# Altium PCB Sensor Breakout.PcbDoc
Units mil, origin at the board's own origin, x right, y up, seen from the top; angles counter-clockwise.
Board outline 920 x 1000 mil, 2 copper layers (Top Layer, Bottom Layer); 27 components, 13 nets, 79 pads, 46 vias.
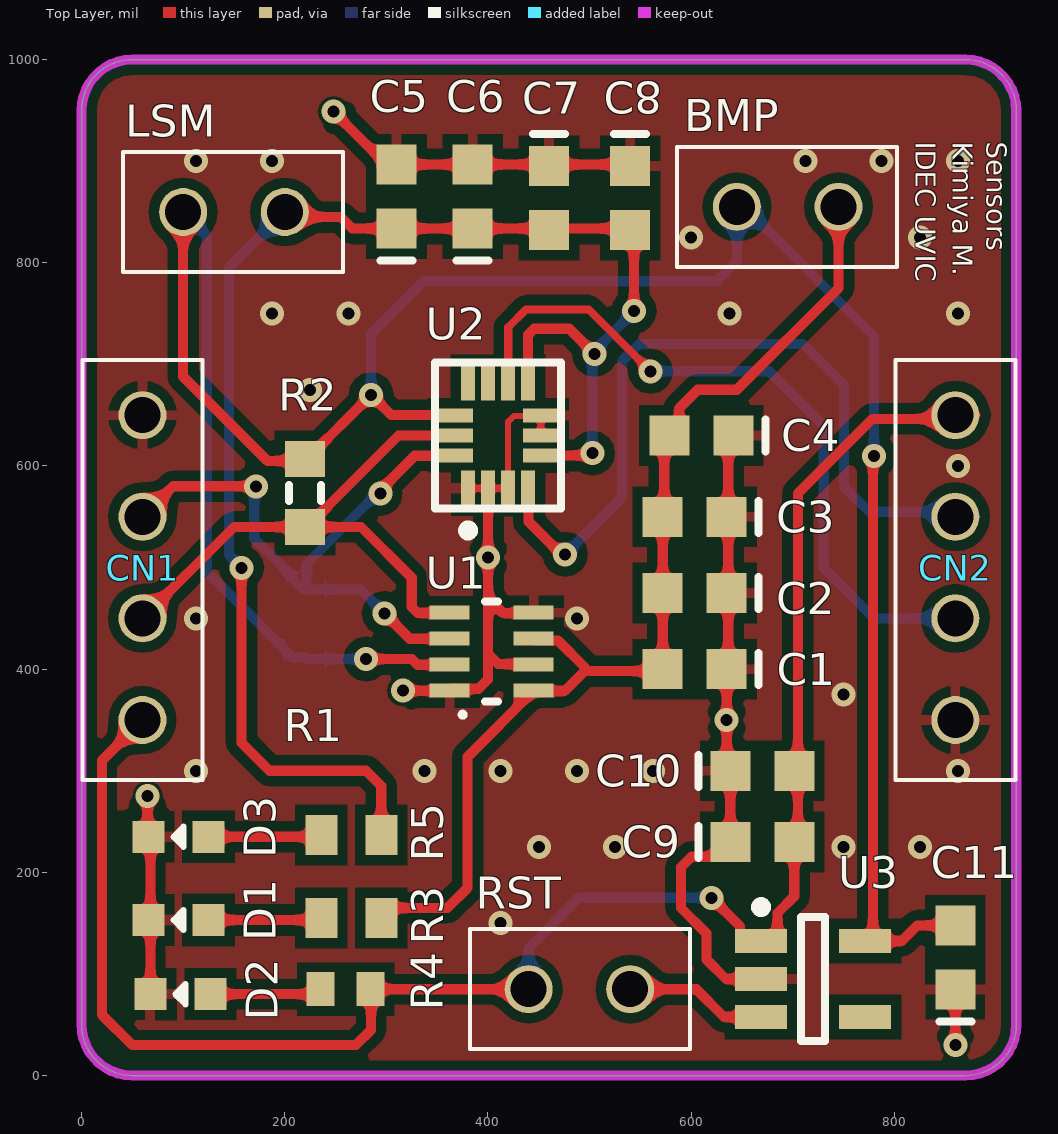
[diagram p0: Top Layer view]
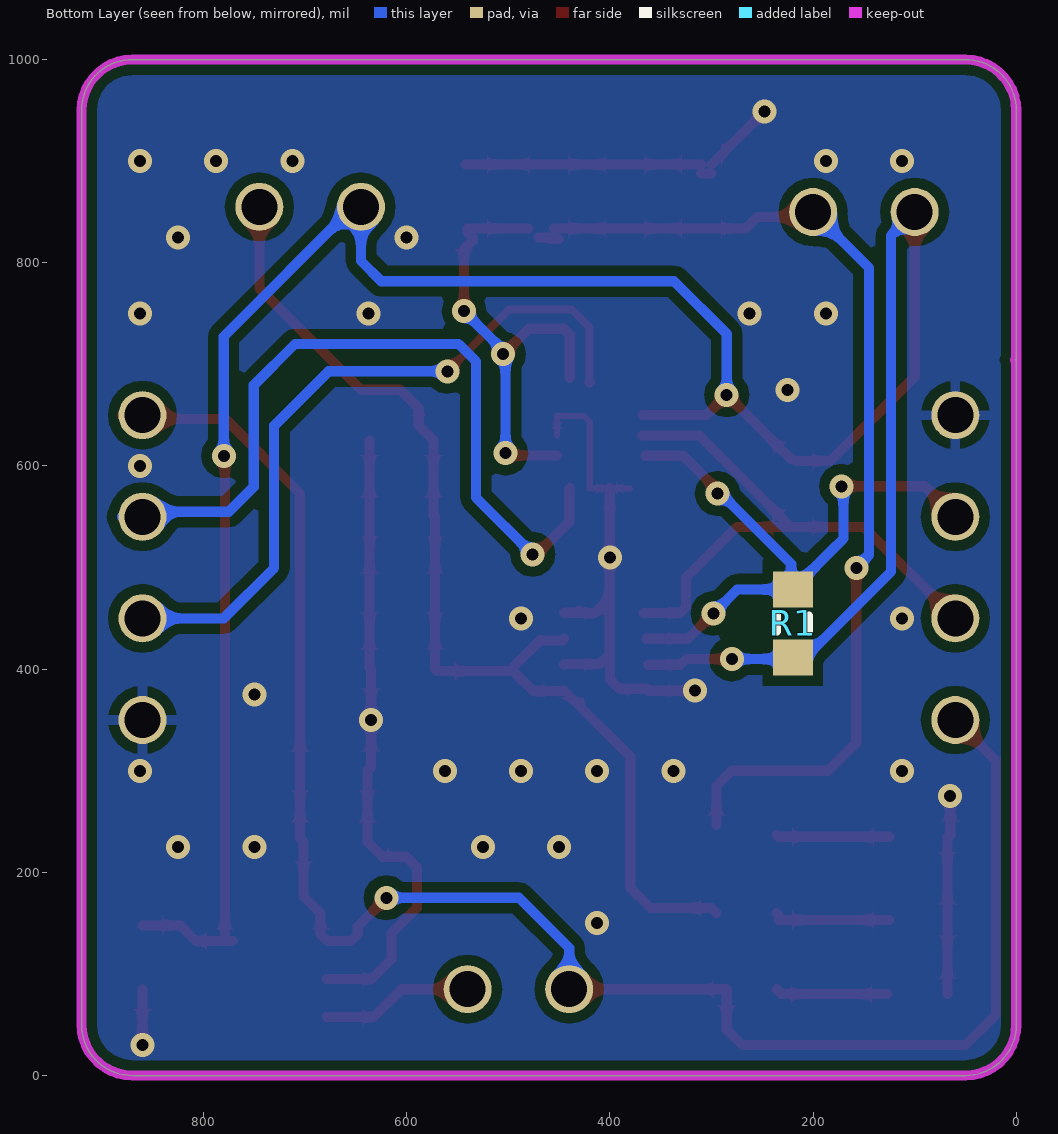
[diagram p1: Bottom Layer view, seen from below]
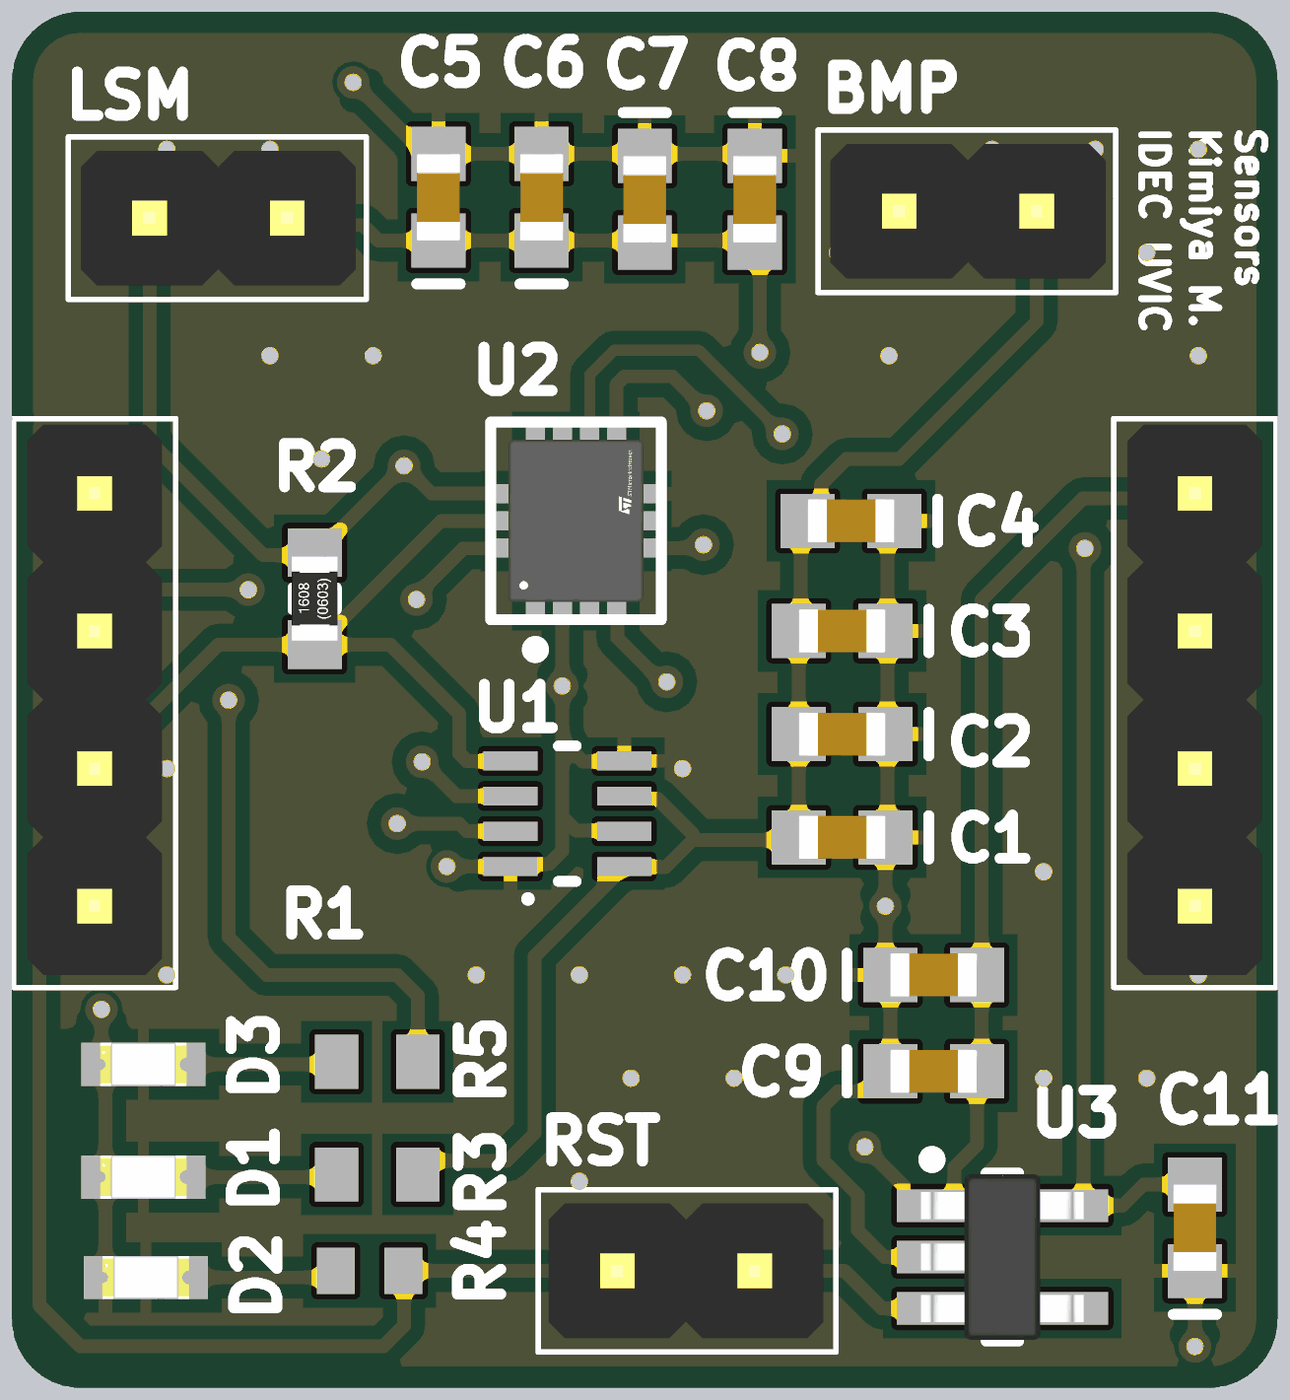
[diagram p2: 3D render of the assembled board from above, using the file's embedded part models]

## Layer stack, top to bottom
Top Solder: solder mask 0.4, Solder Resist, Dk 3.5
Top Layer: signal copper 1.4
Dielectric 1: dielectric 12.6, FR-4, Dk 4.8
Bottom Layer: signal copper 1.4
Bottom Solder: solder mask 0.4, Solder Resist, Dk 3.5

## Board outline
0,50 0,703.39 cw(c0.94,703.39) 0.94,704.33 cw(c0.94,705.28) 0,705.28 0,950 cw(c50,950) 50,1000 870,1000 cw(c870,950) 920,950 920,50 cw(c870,50) 870,0 50,0 cw(c50,50)

## Design rules (kind name [scope] priority, off if disabled: settings)
Clearance [All] p1: gap=10 ignorepadtopadclearanceinfootprint=TRUE except(0: Arc-Hole Track-Hole SMDPad-Hole THPad-Hole Via-Hole Fill-Hole Poly-Hole Region-Hole Text-Hole; 5: Arc-SMDPad Track-SMDPad SMDPad-SMDPad; 7.87: Arc-THPad Track-THPad; 19.68: THPad-THPad)
PolygonConnect [All] p1: connectstyle=Relief reliefconductorwidth=10 reliefentries=4 polygonreliefangle="90 Angle" airgapwidth=10
RoutingVias [All] p1: holewidth=28 width=50 viastyle="Through Hole" minholewidth=28 minwidth=50 maxholewidth=28 maxwidth=50
SolderMaskExpansion [All] p1: expansion=4 istentingtop=FALSE
Width [All] p1: maxlimit=10 minlimit=6 preferedwidth=10 minimp=50.000000 maximp=50.000000 favimp=50.000000
30 further rules are at their usual default settings.

## Components (designator, comment, footprint, x,y, rotation, side; value= is the part's Value field where it differs from the comment)
BMP "1x2 Male Header" "2X1 Males Header" 645,855 r0 top (schematic designator JP1)
C1 "1uF 25V 0603 SMD, Ceramic" "CAPC1608N(0603\")" 603.5,400 r180 top value=1µF
C2 "0.1uF, 50V, 10%, X7R, 0603" "CAPC1608N(0603\")" 603.5,475 r180 top
C3 "10 nF, 50V 0603 SMD, Ceramic" "CAPC1608N(0603\")" 603.5,550 r180 top value=10nF
C4 "1nF, Ceramic, 50V, +-1%, SMD, NP0" "CAPC1608N(0603\")" 610,630 r180 top value=1nF
C5 "0.1uF, 50V, 10%, X7R, 0603" "CAPC1608N(0603\")" 310,865.2 r90 top
C6 "0.1uF, 50V, 10%, X7R, 0603" "CAPC1608N(0603\")" 385,865.2 r90 top
C7 "10 nF, 50V 0603 SMD, Ceramic" "CAPC1608N(0603\")" 460,863.7 r270 top value=10nF
C8 "1uF 25V 0603 SMD, Ceramic" "CAPC1608N(0603\")" 540,863.7 r270 top value=1µF
C9 "1uF 25V 0603 SMD, Ceramic" "CAPC1608N(0603\")" 670,230 r0 top value=1µF
C10 "0.1uF 16V 0603 SMD, Ceramic" "CAPC1608N(0603\")" 670,300 r0 top value=0.1µF
C11 "4.7uF 10V 0603 SMD, Ceramic" "CAPC1608N(0603\")" 860,116.3 r90 top value=4.7µF
CN1 "Header, Male, 1x4" "Header, Male, 1X4" 60,350 r90 top
CN2 "Header, Male, 1x4" "Header, Male, 1X4" 860,350 r90 top
D1 "LBQ39E-N1OO-35-1" FP-LB_Q39E-MFG 95.47,153.09 r0 top
D2 "LT Q39G-Q1OO-25-1" FP-LB_Q39E-MFG 97.28,80.14 r0 top
D3 "LBQ39E-N1OO-35-1" FP-LB_Q39E-MFG 95.47,235 r0 top
LSM "1x2 Male Header" "2X1 Males Header" 100,850 r0 top (schematic designator JP2)
R1 "4.7kR, 1%, 1/8W, 0603 SMD" "RESC1608N(0603\")" 220,445 r270 bottom value=4.7k
R2 "4.7kR, 1%, 1/8W, 0603 SMD" "RESC1608N(0603\")" 220,573.46 r90 top value=4.7k
R3 "RC0603FR-07110RL" RESC1608X55X25ML10T15 265.47,155 r180 top
R4 "ERJ-3EKF5360V" RESC1608X55X30LL15T15 260,85 r180 top
R5 "RC0603FR-07110RL" RESC1608X55X25ML10T15 265.47,236.91 r180 top
RST "1x2 Male Header" "2X1 Males Header" 540,85 r180 top (schematic designator JP3)
U1 "BMP280 Barometric Pressure Sensor" BOSC-LGA-8_V 403.66,417.2 r90 top
U2 "LSM6DSMTR, Accelerometer/Gyroscope, LGA-14" FP-LGA-14L-DM00249496-MFG 410,630 r90 top
U3 "LP2981-33DBVR" SOT95P280X145-5N 720,95 r0 top

## Footprints (in the part's own frame and the unit in brackets; to place one, negate y for a bottom-side part, rotate by r counter-clockwise, add the part's x,y. Pads: shape width x height; smd on the part's side, far side on the other; paste and mask are expansions set on the pad)
"2X1 Males Header" [mm]
  round 1.2 hole 0.9: 1(0,0) 2(2.54,0)
  silkscreen extent -1.5,-1.5 4,1.5, body extent -1.27,-1.24 3.81,1.25, height 8.54
BOSC-LGA-8_V [mm] "LGA, 8-Leads, Body 2.5x2mm, Pitch 0.65mm"
  rect 0.35x1 smd: 1(-0.975,1.05) 2(-0.325,1.05) 3(0.325,1.05) 4(0.975,1.05) 5(0.975,-1.05) 6(0.325,-1.05) 7(-0.325,-1.05) 8(-0.975,-1.05)
  silkscreen extent -1.64,-0.16 1.25,0.79, body extent -1.25,-1 1.25,1, height 1
"CAPC1608N(0603\")" [mm] "Chip Capacitor, Body 1.6x0.8mm (0603\"), IPC Medium Density"
  rect 1x1 smd: 1(-0.8,0) 2(0.8,0)
  silkscreen extent -1.6,-0.4 -1.6,0.4, body extent -0.8,-0.4 0.8,0.4, height 0.9
FP-LB_Q39E-MFG [mm]
  rect 0.8x0.8 smd paste+0 mask+0: 1(-0.75,0) 2(0.75,0)
  silkscreen extent -0.13,-0.25 0.13,0.25, body extent -1.25,-0.55 1.25,0.55, height 0.25
FP-LGA-14L-DM00249496-MFG [mil]
  rect 35x13.78 smd paste+0 mask+0: 1(-52,29.53) 2(-52,9.84) 3(-52,-9.84) 4(-52,-29.53) 8(52,-29.53) 9(52,-9.84) 10(52,9.84) 11(52,29.53)
  rect 13.78x35 smd paste+0 mask+0: 5(-19.68,-42) 6(0,-42) 7(19.68,-42) 12(19.68,42) 13(0,42) 14(-19.68,42)
  silkscreen extent -98,-62 72,62, body extent -81,-71 81,71, height 10
"Header, Male, 1X4" [mm]
  round 1.2 hole 0.9: 1(0,0) 2(2.54,0) 3(5.08,0) 4(7.62,0)
  silkscreen extent -1.5,-1.5 9,1.5, body extent -1.27,-1.24 8.89,1.25, height 8.54
"RESC1608N(0603\")" [mm] "Chip Resistor, Body 1.6x0.8mm (0603\"), IPC Medium Density"
  rect 0.9x1 smd: 1(-0.85,0) 2(0.85,0)
  silkscreen extent -0.2,-0.4 0.2,0.4, body extent -0.77,-0.42 0.78,0.43, height 0.44
RESC1608X55X25ML10T15 [mm] "Chip Resistor, 2-Leads, Body 1.60x0.80mm, IPC Low Density"
  rect 0.8x1 smd: 1(-0.75,0) 2(0.75,0)
  body extent -0.85,-0.45 0.85,0.45, height 0.55
RESC1608X55X30LL15T15 [mm] "Chip Resistor, 2-Leads, Body 1.60x0.80mm, IPC High Density"
  rect 0.7x0.85 smd: 1(-0.625,0) 2(0.625,0)
  body extent -0.87,-0.48 0.87,0.48, height 0.55
SOT95P280X145-5N [mm] "SOT23, 5-Leads, Body 2.90x2.80mm, Pitch 0.95mm, IPC Medium Density"
  rect 1.3x0.6 smd: 1(-1.3,0.95) 2(-1.3,0) 3(-1.3,-0.95) 4(1.3,-0.95) 5(1.3,0.95)
  silkscreen extent -1.42,-1.55 0.3,1.92, body extent -1.5,-1.53 1.5,1.53, height 1.45

## Part data
BMP LSM RST: library part CMP-004-0001-1, Component Type=Standard, Design Item ID="1x2 Male Header", Made By="Andy Bates", Pin Count=2, Source=AUVic_Schematic_Library_Connectors.SchLib
C1 C8 C9: library part CMP-006-0027-1, "Capacitor, Ceramic, 25V, +/- 10%, 0603 SMD, X5R", Component Type=Standard, Created By="Andy Bates", Design Item ID="1uF 25V 0603 SMD, Ceramic", MFG=Murata-Electronics-North-America, MFG#=GRM188R61E105KA12D, PackageDescription="Chip Capacitor", Pin Count=2, Published=16-06-27, Publisher=AUVic, Source=AUVic_Schematic_Library_Capacitors.SchLib
C2 C5 C6: library part CMP-006-0007-1, "0.1µF ±10% Ceramic Capacitor X7R 0603 (1608 Metric)", Capacitance=0.1µF, Operating Temperature="-55°C ~ 125°C", Package / Case="0603 (1608 Metric)", Component Type=Standard, ComponentLink1Description=Digi-Key, ComponentLink1URL=https://www.digikey.ca/product-detail/en/tdk-corporation/C1608X7R1H104M080AA/445-5098-1-ND/2093713, Created By="Poorna Chander Kalidas", Design Item ID="0.1uF, 50V, 10%, X7R, 0603", Mounting Type="Surface Mount, MLCC", Pin Count=2, Source=AUVic_Schematic_Library_Capacitors.SchLib
C3 C7: library part CMP-006-0010-1, "Capacitor, Ceramic, 50V, +/- 10%, 0603 SMD", Component Type=Standard, Created By=Gabriel, Design Item ID="10 nF, 50V 0603 SMD, Ceramic", MFG=Samsung, MFG#=GRM188R61A475KE15D, PackageDescription="Chip Capacitor", Pin Count=2, Published=16-06-23, Publisher=AUVic, Source=AUVic_Schematic_Library_Capacitors.SchLib
C4: library part CMP-006-0026-1, "Capacitor, Ceramic, 50V, +-1%, 0603 SMD, NP0", Component Type=Standard, Date Created=09/28/2016, Design Item ID="1nF, Ceramic, 50V, +-1%, SMD, NP0", Made By="Jordan Day", PackageDescription="Chip Capacitor", Pin Count=2, Publisher=AUVic, Source=AUVic_Schematic_Library_Capacitors.SchLib
C10: library part CMP-006-0005-1, "Capacitor, Ceramic, 16V, +/- 10%, 0603 SMD, X7R", Component Type=Standard, Created By="Andy Bates", Design Item ID="0.1uF 16V 0603 SMD, Ceramic", PackageDescription="Chip Capacitor", Pin Count=2, Published=16-04-26, Publisher=AUVic, Source=AUVic_Schematic_Library_Capacitors.SchLib
C11: library part CMP-006-0043-1, "Capacitor, Ceramic, 10V, +/- 10%, 0603 SMD, X5R", Component Type=Standard, Created By="Ashwin Sira", Design Item ID="4.7uF 10V 0603 SMD, Ceramic", MFG=Samsung, MFG#=GRM188R61A475KE15D, PackageDescription="Chip Capacitor", Pin Count=2, Published=16-06-23, Publisher=AUVic, Source=AUVic_Schematic_Library_Capacitors.SchLib
CN1 CN2: library part CMP-005-0028-1, "1x4, Pads Pitch: 0.1\" (2.54mm), Through hole", Component Type=Standard, Design Item ID="Header, Male, 1x4", Made Bates="Andy Bates", Pin Count=4, Source=AUVic_Schematic_Library_Connectors.SchLib
D1 D3: library part CMP-00063-3, "LED BLUE DIFFUSED 0603 SMD", Case Code (Imperial)=0603, Case Code (Metric)=1608, Color=Blue, Forward Voltage=2.85V, Lens Color=White, Test Current=5mA, Case/Package=0603, Dominant Wavelength=470nm, Height=0.4mm, Length=1.6mm, Lens Size=0.8mm, Lens Style=Flat,Diffused,Colorless,Rectangular, Lens Transparency=Diffused, Luminous Flux=0.13lm, Luminous Intensity=42mcd, Mount="Surface Mount", Number of LEDs=1, Number of Pins=2, Packaging="Tape and Reel", Radiation Hardening=No, Viewing Angle=130°, Width=0.8mm
D2: library part CMP-00064-3, "LED GREEN DIFFUSED 0603 SMD", Case/Package=SMD/SMT, Color=Green, Forward Current=15mA, Forward Voltage=2.85V, Max Operating Temperature=85°C, Min Operating Temperature=-40°C, Reverse Voltage=5V, Test Current=5mA, Depth=0.9mm, Dominant Wavelength=530nm, Length=1.7mm, Lens Style=Diffused,Colorless,Rectangular, Luminous Flux=0.55lm, Luminous Intensity=280mcd, Mount="Surface Mount", Number of Elements=1, Number of LEDs=1, Number of Pins=2, Packaging="Tape and Reel", Radiation Hardening=No
R1 R2: library part CMP-047-0049-1, Component Type=Standard, Created On=14-05-31, Design Item ID="4.7kR, 1%, 1/8W, 0603 SMD", Last Edited=14-05-31, Made By="Ashwin Sira", Owned By=AUVic, Pin Count=2, Source=AUVic_Schematic_Library_Resistors.SchLib
R3 R5: library part CMP-00069-1, "RES SMD 110 OHM 1% 1/10W 0603", Case Code (Imperial)=0603, Case Code (Metric)=1608, Max Operating Temperature=155°C, Max Power Dissipation=100mW, Min Operating Temperature=-55°C, Package Quantity=1, Resistance=110R, Temperature Coefficient=100ppm/°C, Tolerance=1%, Voltage Rating=50V, Working Voltage=75V, Case/Package=0603, Composition="Thick Film", Depth=0.8mm, Features="Moisture Resistant", Height=0.022inch, Lead Free="Lead Free", Length=1.6mm, Military Standard=Not, Number of Terminations=2, Packaging="Tape and Reel", Power Rating=100mW, Termination=SMD/SMT, Voltage Rating (DC)=50V, Width=0.031inch
R4: library part CMP-00071-1, "SMD Chip Resistor, 0603 [1608 Metric], 536 ohm, ERJ3EK Series, 75 V, Thick Film, 100 mW", Case Code (Imperial)=0603, Case Code (Metric)=1608, Max Operating Temperature=155°C, Max Power Dissipation=100mW, Min Operating Temperature=-55°C, Package Quantity=1, Resistance=536R, Temperature Coefficient=100ppm/°C, Tolerance=1%, Voltage Rating=75V, Voltage Rating (DC)=50V, Case/Package=0603, Composition="Thick Film", Contact Plating=Tin, Depth=0.8mm, Features="Automotive AEC-Q200", Height=0.022inch, Lead Free="Lead Free", Length=1.6mm, Military Standard=Not, Mount="Surface Mount", Number of Terminations=2, Packaging="Tape and Reel", Power Rating=100mW, REACH SVHC="No SVHC", Termination=SMD/SMT, Width=0.8mm
U1: library part CMP-00103-3, "BMP280 Absolute Barometric Pressure Sensor for Battery Powered Devices 2 x 2.5mm", Case/Package=SMD/SMT, Max Operating Temperature=85°C, Min Operating Temperature=-40°C, Operating Pressure=15.95PSI, Lead Free="Lead Free", Max Pressure=290.08PSI, Number of Pins=8, Output Type=SPI,I2C, Port Style="No Port", Pressure Type=Absolute, Termination=SMD/SMT
U2: library part CMP-00100-1, "IMU ACCEL/GYRO I2C/SPI 14LGA", Case/Package=LGA, Max Supply Voltage=3.6V, Min Supply Voltage=1.71V, Number of Pins=14, Packaging="Cut Tape", REACH SVHC="No SVHC"
U3: library part CMP-044-0003-2, "IC REG LINEAR 3.3V 100MA SOT23-5", Case/Package=SOT-23, Dropout Voltage=200mV, Input Bias Current=600uA, Max Input Voltage=16V, Max Operating Temperature=125°C, Max Output Current=100mA, Min Input Voltage=2.2V, Min Operating Temperature=-40°C, Nominal Output Voltage=3.3V, Output Voltage Accuracy=2%, Package Quantity=1, Accuracy=2%, Contact Plating=Tin,Matte, Lead Free="Lead Free", Mount="Surface Mount", Number of Outputs=1, Number of Pins=5, Number of Regulators=1, Output Current=100mA, Output Type=Fixed, Output Voltage=3.3V, Packaging="Tape and Reel", Polarity=Positive, Quiescent Current=600uA, Radiation Hardening=No, REACH SVHC="No SVHC"

## Via types
v1: diameter 23.62, hole 11.81, Top Layer to Bottom Layer, tented both sides, 46 vias

## Nets (pads, with @x,y where several pads share a name; then routed paths per layer and width w, separated by ;. In a path a pad name is that pad's centre, name@x,y a point inside that pad or via, vN(x,y) a via of type N, cw(c..) or ccw(c..) an arc to the next point about the centre after c; other vN are vias at no path point)
3V3: BMP.1 C11.2 LSM.1 R1.2 R2.2 U1.2 U2.12 U3.5 | length 2517.5
  Top Layer w10: LSM.1 100,687.92 182.92,605 R2.2@216.93,605 ; R2.2 221.97,606.93 v1(285,670) ; v1(280,410) 325,410 330.59,404.41 U1.2 ; v1(285,670) 305,650 U2.12@367.69,650 ; U3.5 U3.5@778.89,132.4 ; v1(780,610) 778.89,608.89 U3.5@778.89,132.4 ; C11.2 822.8,147.8 807.4,132.4 U3.5@778.89,132.4
  Bottom Layer w10: LSM.1 123.19,826.81 123.19,496.06 207.71,411.54 R1.2 221.54,410 v1(280,410) ; v1(285,670) 285,730 336.81,781.81 625,781.81 645,801.81 BMP.1 652.43,855 780,727.43 v1(780,610)
3V3_BMP: BMP.2 C1.2 C2.2 C3.2 C4.2 R3.1 U1.6 U1.8 | length 1067.2
  Top Layer w10: R3.1@295,160 300,165 360,165 380,185 380,313.82 U1.8@444.69,378.5 ; U1.8 U1.8@444.69,378.5 ; U1.6 446.89,428.11 469.09,428.11 495,402.2 495,398.08 ; BMP.2 745,775 645,675 606.47,675 588.19,656.72 588.19,639.69 573.5,625 573.5,551.5 C3.2 C2.2 C1.2 570.09,398.08 495,398.08 ; U1.8@444.69,378.5 475.43,378.5 495,398.08
3V3_LSM: C5.1 C6.1 C7.2 C8.2 LSM.2 R5.1 U2.5 U2.8 | length 1498.6
  Top Layer w10: v1(157.44,499.73) 157.44,327.56 185,300 280,300 295,285 R5.1@295,246.91 ; LSM.2 205,845 255,845 266.3,833.7 275,833.7 280.47,833.7 C5.1 C6.1 C7.2@455,833.7 ; U2.8@439.53,686.48 439.53,729.14 445.39,735 480,735 v1(505,710) ; C7.2@450,823.5 C7.2@460,823.5 ; U2.5 500.31,610.32 v1(502.66,612.66) ; C7.2@455,825 465,825 C7.2@470,825 ; 480,833.7 C8.2@535,833.7 ; C8.2@535,822.01 543.7,813.31 v1(543.7,752.38) ; C8.2@535,825 540,830 C8.2 C8.2@540,833.65
  Bottom Layer w10: v1(157.44,499.73) 157.44,499.96 145,512.4 145,795 LSM.2 ; v1(502.66,612.66) 502.66,707.66 v1(505,710) 505,713.69 v1(543.7,752.38)
5V: C9.2 C10.2 CN1.1 CN2.4 R4.1 RST.2 U3.1 | length 1728.6
  Top Layer w10: CN1.1 20,310 20,60 50,30 270,30 285,45 285,85 RST.2 ; v1(620,175) 648.23,146.77 648.23,139.21 655.04,132.4 678.19,132.4 685,139.21 685,160 701.5,176.5 C9.2 705,233.5 705,300 705,572.92 778.46,646.38 CN2.4@840,646.38 ; CN2.4@876.38,646.38 CN2.4@880,650
  Bottom Layer w10: RST.2 440,125.48 489.52,175 v1(620,175)
GND: C1.1 C2.1 C3.1 C4.1 C5.2 C6.2 C7.1 C8.1 C9.1 C10.1 C11.1 CN1.4 CN2.1 D1.1 D2.1 D3.1 U1.1 U1.5 U1.7 U2.1 U2.2 U2.3 U2.6 U2.7 U3.2 | length 1736.8
  Top Layer w6: U2.1 U2.2 U2.3@419.53,578 ; U2.3 419.84,643.48 425.68,649.32 451.63,649.32 U2.7 U2.6
  Top Layer w10: D3.1@65,235.94 D3.1 ; v1(65,275) 65,237.76 67.76,235 D2.1 ; v1(247.99,948.7) C5.2@300,896.69 ; C5.2@300,887.99 C5.2@310,887.99 ; C5.2 C6.2 C8.1@542.01,896.69 ; v1(316.18,378.82) U1.1 364.21,380.71 390.71,380.71 400,390 400,414.69 400.16,414.84 ; 400,535 400,531.31 400.16,531.16 ; U2.2 400.16,531.16 ; U1.5@430.31,455.16 415,455.16 400.16,470 ; U1.5@430.31,457.48 432.2,455.59 U1.5 ; U1.7 444.41,405 410,405 400.16,414.84 ; C4.1@636.5,625 636.5,401.5 C1.1 v1(635,350) 635,303.5 C10.1 C9.1 623.82,215.31 600.31,215.31 590,205 590,165 615,140 615,114.35 634.35,95 U3.2@678.82,95 ; v1(860,30) C11.1 ; 400.16,414.84 400.16,470 ; 400.16,470 400.16,531.16
  other v1: 412.5,150 450,225 525,225 750,225 825,225 112.5,300 337.5,300 412.5,300 487.5,300 562.5,300 862.5,300 750,375 112.5,450 487.5,450 400,510 862.5,600 225,675 187.5,750 262.5,750 637.5,750 862.5,750 600,825 825,825 112.5,900 187.5,900 712.5,900 787.5,900 862.5,900
INT1: CN2.3 U2.4 | length 770.5
  Top Layer w10: U2.4 440,577.53 440,545 471.99,513.01 v1(476.03,513.01) v1@473.42,515.62
  Bottom Layer w10: v1(476.03,513.01) 531.81,568.79 531.81,702.92 548.89,720 710,720 750.47,679.53 750.47,579.53 775,555 855,555 CN2.3 ; CN2.3@875,555 CN2.3@880,550
INT2: CN2.2 U2.9 | length 709.7
  Top Layer w8: U2.9@420,682.16 420,736.48 437.52,754 499.19,754 v1(560,693.19)
  Top Layer w10: U2.9 U2.9@420,682.16
  Bottom Layer w10: v1(560,693.19) 676.81,693.19 730.47,639.53 730.47,499.53 780,450 CN2.2
NetD1_2: D1.2 R3.2 | length 111.7
  Top Layer w10: D1.2 R3.2@234.04,153.09 ; R3.2@234.04,158.09 R3.2@235.94,160
NetD2_2: D2.2 R4.2 | length 111
  Top Layer w10: D2.2 230.93,80.14 R4.2@235.79,85
NetD3_2: D3.2 R5.2 | length 111.7
  Top Layer w10: D3.2 234.04,235 R5.2
NetJP3_1: RST.1 U3.3 | length 150.2
  Top Layer w10: RST.1 605,85 632.4,57.6 U3.3@678.82,57.6
SCL: CN1.2 R2.1 U1.4 U2.13 | length 579.4
  Top Layer w10: CN1.2 150,540 R2.1 R2.1@221.97,540 ; U1.4@366.77,455.28 330.86,455.28 325,461.13 325,490 275,540 R2.1@221.97,540 ; U2.13 311.97,630 R2.1@221.97,540
SDA: CN1.3 R1.1 U1.3 U2.14 | length 627.8
  Top Layer w10: CN1.3 90,580 v1(171.81,580) ; v1(294.04,572.84) 294.04,576.12 327.92,610 U2.14@365,610 ; v1(298.19,454.91) 323.1,430 363.66,430 U1.3@363.98,429.69
  Bottom Layer w10: v1(171.81,580) 170,578.19 170,528.46 183.03,515.44 205.31,493.15 205.31,491.18 218.03,478.46 R1.1 ; v1(294.04,572.84) 290.76,572.84 221.46,503.54 221.46,479.92 R1.1 ; v1(298.19,454.91) 274.63,478.46 R1.1
pads on no net: U2.10 U2.11 U3.4

## Polygon pours and split planes (outlines as drawn)
GND on Top Layer "GND_L01_P000" (solid, pour order 0): 0,1000 920,1000 920,5 925,0 0,0
GND on Bottom Layer "GND_L02_P001" (solid, pour order 1): 0,1000 920,1000 922.5,997.5 922.5,2.5 2.5,2.5 0,0

## Keep-outs
Keep-Out Layer:
  lines w10: 0,50 ccw(c50,50) 50,0 80,0 870,0 ccw(c870,50) 920,50 920,95 920,950 ccw(c870,950) 870,1000 845,1000 50,1000 ccw(c50,950) 0,950 0,930 0,865 0,705.28 ccw(c0.94,705.28) 0.94,704.33 ccw(c0.94,703.39) 0,703.39 0,50

## Silkscreen, mask and mechanical layers (free items; w line width, h text height)
Top Overlay:
  text "IDEC UVIC" at 820.91,919.09 h19.68 r270
  text "Kimiya M." at 857.46,919.09 h19.68 r270
  text "Sensors" at 890.91,919.09 h19.68 r270